# EAGLE board EPDeind (EAGLE 9.7.0)

Size 258.5 x 101.49 mm. Coordinates in mm from the lower left corner, seen from the top.
Outline: 0,0 258.5,0 258.5,101.49 0,101.49 0,0
Copper layers (1*16): Top 0.035mm / dielectric 1.5mm / Bottom 0.035mm
Design rules "default": minimum track width 6mil, minimum drill 0.35mm, track to track 6mil, track to pad 6mil, pad to pad 6mil, via to via 6mil, smd to smd 6mil, copper to edge 40mil, drill to drill 6mil, minimum pad ring 10mil, minimum via ring 8mil, stop-mask expansion 4mil, vias tented up to drill 0mil, thermal gap 10mil

## Footprints (pad centres in the part's own frame; a part is rotated, then mirrored left to right if it is on the bottom)
CAP-THRU-2.54MM = drill 1.016 pad 1.88: 1 -1.27,0; 2 1.27,0
LEDRD254W60D565H860B_G = drill 0.981 pad 1.581: 1 -1.27,0; 2 1.27,0
LEDRD254W60D565H860B_Y = drill 0.981 pad 1.581: 1 -1.27,0; 2 1.27,0
LEDRD254W60D565H860B = drill 0.981 pad 1.581: 1 -1.27,0; 2 1.27,0
7SEG-13 = drill 0.813 long: 1 -5.08,-7.62; 2 -2.54,-7.62; 3 0,-7.62; 4 2.54,-7.62; 5 5.08,-7.62; 6 5.08,7.62; 7 2.54,7.62; 8 0,7.62; 9 -2.54,7.62; 10 -5.08,7.62
PIEZO = drill 1 pad 1.6: 1 -3.5,0; 2 3.5,0
RESAD1016W63L850D250B = drill 0.83 pad 1.43: 1 -5.08,0; 2 5.08,0
HA-06-SM065 = drill 1 pad 1.676: 1 -2.54,-2.54; 2 0,2.54; 3 2.54,-2.54
SWITCH-MOMENTARY-PTH-6.5MM = drill 1.016 pad 1.88: 1 -3.251,2.261; 2 3.251,2.261; 3 -3.251,-2.261; 4 3.251,-2.261
SG90 = drill 1.016 long: 1 -2.54,0; 2 0,0; 3 2.54,0
ARDUINO-UNO-R3-SHIELD = drill 1.016 pad 1.88: 3.3V 24.13,-2.54; 5V 24.13,0; A0 24.13,12.7; A1 24.13,15.24; A2 24.13,17.78; A3 24.13,20.32; A4 24.13,22.86; A5 24.13,25.4; AREF -24.13,-13.97; D2 -24.13,20.32; D3 -24.13,17.78; D4 -24.13,15.24; D5 -24.13,12.7; D6 -24.13,10.16; D7 -24.13,7.62; D8 -24.13,3.81; D9 -24.13,1.27; D10 -24.13,-1.27; D11 -24.13,-3.81; D12 -24.13,-6.35; D13 -24.13,-8.89; GND@0 24.13,2.54; GND@1 24.13,5.08; GND@2 -24.13,-11.43; IOREF 24.13,-7.62; NC 24.13,-10.16; RES 24.13,-5.08; RX -24.13,25.4; SCL -24.13,-19.05; SDA -24.13,-16.51; TX -24.13,22.86; VIN 24.13,7.62
DIP762W53P254L1969H508Q16B = drill 0.743 pad 1.343: 1 -3.81,8.89; 2 -3.81,6.35; 3 -3.81,3.81; 4 -3.81,1.27; 5 -3.81,-1.27; 6 -3.81,-3.81; 7 -3.81,-6.35; 8 -3.81,-8.89; 9 3.81,-8.89; 10 3.81,-6.35; 11 3.81,-3.81; 12 3.81,-1.27; 13 3.81,1.27; 14 3.81,3.81; 15 3.81,6.35; 16 3.81,8.89

## Placement (x,y rotation side)
C2  100m  [CAP-THRU-2.54MM]  99.69,48.99 90 top
D1  GREEN  [LEDRD254W60D565H860B_G]  42.55,35.02 180 top
D2  YELLOW  [LEDRD254W60D565H860B_Y]  47.62,35.02 180 top
D3  RED  [LEDRD254W60D565H860B]  52.7,35.02 180 top
D4  RED  [LEDRD254W60D565H860B]  57.78,35.02 180 top
D5  YELLOW  [LEDRD254W60D565H860B_Y]  62.87,35.02 180 top
D6  GREEN  [LEDRD254W60D565H860B_G]  67.94,35.02 180 top
DIGIT1  7SEG-CK  [7SEG-13]  114.94,24.86 0 top
PIEZO1  PIEZO  [PIEZO]  78.11,19.78 180 top
R1  1k  [RESAD1016W63L850D250B]  122.56,14.7 0 top
R2  1k  [RESAD1016W63L850D250B]  107.31,37.56 0 top
R3  1k  [RESAD1016W63L850D250B]  104.78,40.1 0 top
R4  1k  [RESAD1016W63L850D250B]  125.09,40.1 0 top
R5  1k  [RESAD1016W63L850D250B]  122.56,37.56 0 top
R6  1k  [RESAD1016W63L850D250B]  125.09,12.16 0 top
R7  1k  [RESAD1016W63L850D250B]  104.78,12.16 0 top
R8  1k  [RESAD1016W63L850D250B]  107.31,14.7 0 top
R9  1k  [RESAD1016W63L850D250B]  66.67,45.18 90 top
R10  1k  [RESAD1016W63L850D250B]  61.59,45.18 90 top
R11  1k  [RESAD1016W63L850D250B]  56.52,45.18 90 top
R12  1k  [RESAD1016W63L850D250B]  51.44,45.18 90 top
R13  1k  [RESAD1016W63L850D250B]  46.35,45.18 90 top
R14  1k  [RESAD1016W63L850D250B]  41.27,45.18 90 top
R15  1k  [RESAD1016W63L850D250B]  71.75,27.4 90 top
R16  1k  [RESAD1016W63L850D250B]  10.79,45.18 90 top
R17  1k  [RESAD1016W63L850D250B]  18.41,45.18 90 top
R18  1k  [RESAD1016W63L850D250B]  28.57,45.18 90 top
R19  1k  [RESAD1016W63L850D250B]  36.2,45.18 90 top
RPOT1  250k  [HA-06-SM065]  62.11,94.44 0 top
S1  SWITCH_MOMENTARY  [SWITCH-MOMENTARY-PTH-6.5MM]  33.66,26.13 90 top
S2  SWITCH_MOMENTARY  [SWITCH-MOMENTARY-PTH-6.5MM]  26.04,26.13 90 top
S3  SWITCH_MOMENTARY  [SWITCH-MOMENTARY-PTH-6.5MM]  15.88,26.13 90 top
S4  SWITCH_MOMENTARY  [SWITCH-MOMENTARY-PTH-6.5MM]  8.26,26.13 90 top
SERVO1  SERVOSG90  [SG90]  123.3,93.38 270 top
U1  ARDUINO-UNO-R3-SHIELD  [ARDUINO-UNO-R3-SHIELD]  223.98,29.84 270 top
U2  74HC595_PDIP  [DIP762W53P254L1969H508Q16B]  146.69,26.13 90 top

## Library data of the parts
C2 PIEZO1 R1-R19 RPOT1 S1-S4 SERVO1 U1 U2 = Tinkercad
D1 D6 = Tinkercad; CATEGORY: Opto-Electronic; SUB-CATEGORY: LED; VALUE: LED_GREEN
D2 D5 = Tinkercad; CATEGORY: Opto-Electronic; SUB-CATEGORY: LED; VALUE: LED_YELLOW
D3 D4 = Tinkercad; CATEGORY: Opto-Electronic; SUB-CATEGORY: LED; VALUE: LED_RED
DIGIT1 = Tinkercad; CATEGORY: Opto-Electronic; SUB-CATEGORY: Display; TYPE: 7-Segment

## Nets
D1_C: D1.2 R14.1
D2_C: D2.2 R13.1
D3_C: D3.2 R12.1
D4_C: D4.2 R11.1
D5_C: D5.2 R10.1
D6_C: D6.2 R9.1
DIGIT1_A: DIGIT1.7 R5.1
DIGIT1_B: DIGIT1.6 R4.1
DIGIT1_C: DIGIT1.4 R1.1
DIGIT1_D: DIGIT1.2 R8.2
DIGIT1_DP: DIGIT1.5 R6.1
DIGIT1_E: DIGIT1.1 R7.2
DIGIT1_F: DIGIT1.9 R2.2
DIGIT1_G: DIGIT1.10 R3.2
PIEZO1_2: PIEZO1.2 R15.1
U1_5V: C2.1 RPOT1.3 S1.1 S1.2 S2.1 S2.2 S3.1 S3.2 S4.1 S4.2 SERVO1.2 U1.5V U2.10 U2.16
U1_A0: RPOT1.2 U1.A0
U1_A1: R16.1 S4.3 S4.4 U1.A1
U1_A2: R17.1 S3.3 S3.4 U1.A2
U1_A3: R18.1 S2.3 S2.4 U1.A3
U1_A4: R19.1 S1.3 S1.4 U1.A4
U1_D3: R15.2 U1.D3
U1_D4: D1.1 U1.D4
U1_D5: D3.1 U1.D5
U1_D6: D6.1 U1.D6
U1_D7: D4.1 U1.D7
U1_D8: U1.D8 U2.14
U1_D9: U1.D9 U2.12
U1_D10: U1.D10 U2.11
U1_D11: SERVO1.3 U1.D11
U1_D12: D2.1 U1.D12
U1_D13: D5.1 U1.D13
U1_GND: C2.2 DIGIT1.8 PIEZO1.1 R9.2 R10.2 R11.2 R12.2 R13.2 R14.2 R16.2 R17.2 R18.2 R19.2 RPOT1.1 SERVO1.1 U1.GND@0 U1.GND@1 U1.GND@2 U2.8 U2.13
U2_Q0: R4.2 U2.15
U2_Q1: R5.2 U2.1
U2_Q2: R1.2 U2.2
U2_Q3: R8.1 U2.3
U2_Q4: R7.1 U2.4
U2_Q5: R2.1 U2.5
U2_Q6: R3.1 U2.6
U2_Q7: R6.2 U2.7

## Tracks (layer width: path | path; a pad name or v marks a point on that pad's centre or on a via)
D1_C  (1 unrouted)
D2_C  (1 unrouted)
D3_C  (1 unrouted)
D4_C  (1 unrouted)
D5_C  (1 unrouted)
D6_C  (1 unrouted)
DIGIT1_A  (1 unrouted)
DIGIT1_B  (1 unrouted)
DIGIT1_C  (1 unrouted)
DIGIT1_D  (1 unrouted)
DIGIT1_DP  (1 unrouted)
DIGIT1_E  (1 unrouted)
DIGIT1_F  (1 unrouted)
DIGIT1_G  (1 unrouted)
PIEZO1_2  (1 unrouted)
U1_5V  (13 unrouted)
U1_A0  (1 unrouted)
U1_A1  (3 unrouted)
U1_A2  (3 unrouted)
U1_A3  (3 unrouted)
U1_A4  (3 unrouted)
U1_D3  (1 unrouted)
U1_D4  (1 unrouted)
U1_D5  (1 unrouted)
U1_D6  (1 unrouted)
U1_D7  (1 unrouted)
U1_D8  (1 unrouted)
U1_D9  (1 unrouted)
U1_D10  (1 unrouted)
U1_D11  (1 unrouted)
U1_D12  (1 unrouted)
U1_D13  (1 unrouted)
U1_GND  (19 unrouted)
U2_Q0  (1 unrouted)
U2_Q1  (1 unrouted)
U2_Q2  (1 unrouted)
U2_Q3  (1 unrouted)
U2_Q4  (1 unrouted)
U2_Q5  (1 unrouted)
U2_Q6  (1 unrouted)
U2_Q7  (1 unrouted)